# Altium PCB PIR.PcbDoc
Units mm, origin at the board's own origin, x right, y up, seen from the top; angles counter-clockwise.
Board outline 30 x 10.6 mm, 2 copper layers (Top Layer, Bottom Layer); 21 components, 12 nets, 43 pads, 0 vias.
Unrouted connection lines stored in the file: 28.
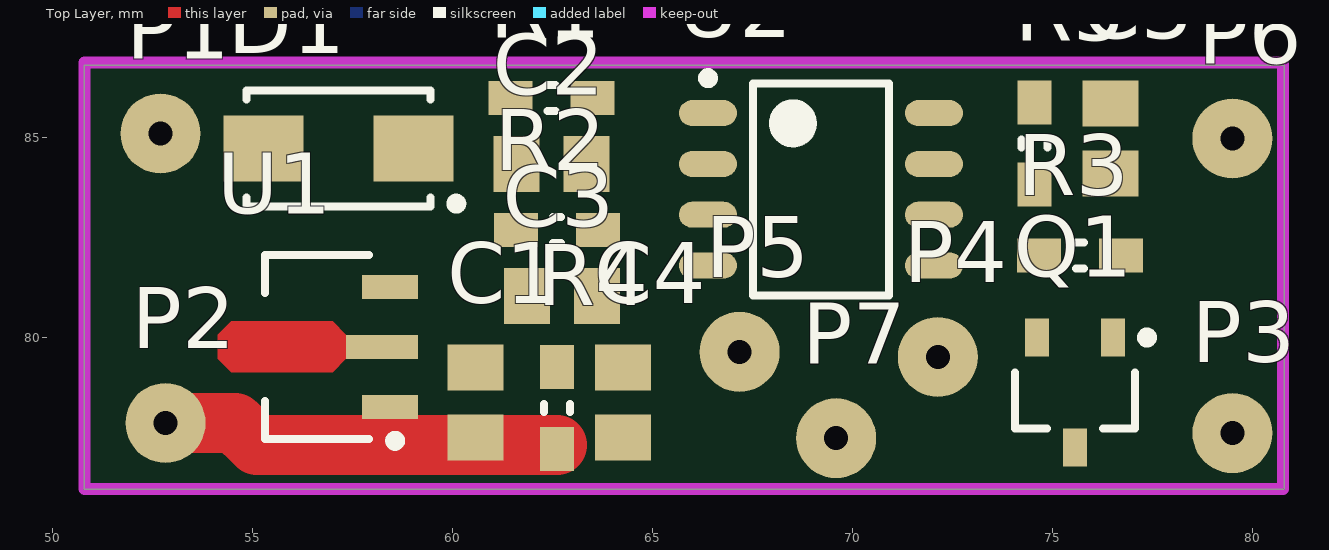
[diagram p0: Top Layer view]
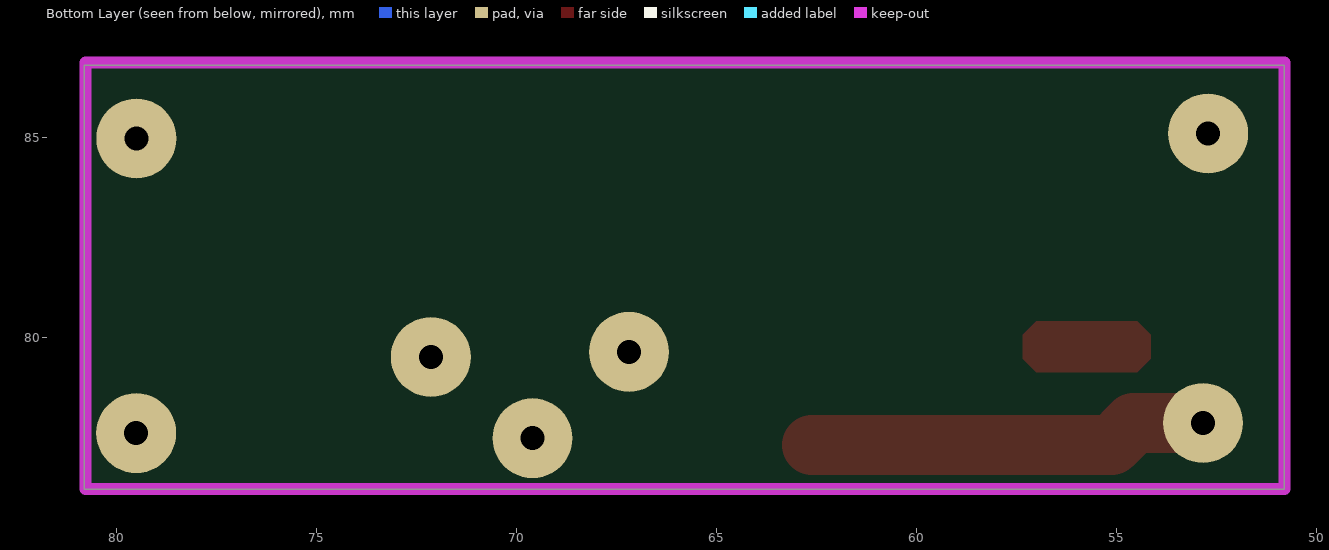
[diagram p1: Bottom Layer view, seen from below]

## Layer stack, top to bottom
Top Solder: solder mask 0.0102, Solder Resist, Dk 3.5
Top Layer: signal copper 0.0356
Dielectric 1: dielectric 0.32, FR-4, Dk 4.8
Bottom Layer: signal copper 0.0356
Bottom Solder: solder mask 0.0102, Solder Resist, Dk 3.5

## Board outline
50.8,76.2 80.8,76.2 80.8,86.8 50.8,86.8

## Design rules (kind name [scope] priority, off if disabled: settings)
Clearance [All] p1: gap=0.2 ignorepadtopadclearanceinfootprint=FALSE
PolygonConnect [All] p1: connectstyle=Relief reliefconductorwidth=0.254 reliefentries=4 polygonreliefangle="90 Angle" airgapwidth=0.254
RoutingVias [All] p1: holewidth=0.6 width=1 viastyle="Through Hole" minholewidth=0.711 minwidth=1.27 maxholewidth=0.711 maxwidth=1.27
SolderMaskExpansion [All] p1: expansion=0.102
Width Power [InNet('GND')  Or InNet('VCC_12V') Or InNet('VCC_5V')] p1: maxlimit=2 minlimit=0.5 preferedwidth=1.5
Width [All] p2: maxlimit=1 minlimit=0.3 preferedwidth=0.5
30 further rules are at their usual default settings.

## Components (designator, comment, footprint, x,y, rotation, side; value= is the part's Value field where it differs from the comment)
C1 "106" CAPC2012X12N 60.579,78.359 r90 top
C2 "103" CAPC2012X12N 62.484,84.328 r0 top
C3 "103" CAPC2012X12N 62.738,81.026 r180 top
C4 "103" CAPC2012X12N 64.262,78.359 r90 top
C5 "102" CAPC2012X12N 76.454,84.963 r270 top
D1 "1N4007" SODFL504X244-2N 57.15,84.709 r180 top
P1 "P" Point 52.705,85.09 r0 top
P2 "P" Point 52.832,77.851 r0 top
P3 "P" Point 79.502,77.597 r0 top
P4 "D" Point 72.136,79.502 r0 top
P5 "S" Point 67.183,79.629 r0 top
P6 "P" Point 79.5,84.963 r0 top
P7 "GND" Point 69.596,77.47 r0 top
Q1 "AO3400" SOT95P278X125-3N 75.565,78.613 r270 top
R1 "3M" RESC2608X06N_0603 62.484,85.979 r0 top
R2 "10K" RESC2608X06N_0603 62.611,82.677 r180 top
R3 "1K" RESC2608X06N_0603 75.692,82.042 r0 top
R4 "47K" RESC2608X06N_0603 62.611,78.232 r90 top
R5 "300K" RESC2608X06N_0603 74.549,84.836 r90 top
U1 "CJA1117B-5.0 SOT89" SOT89-150P409X160-3N 56.642,79.756 r180 top
U2 "EG4002C" TSOP127P620X155-8N 69.215,83.693 r0 top

## Footprints (in the part's own frame and the unit in brackets; to place one, negate y for a bottom-side part, rotate by r counter-clockwise, add the part's x,y. Pads: shape width x height; smd on the part's side, far side on the other; paste and mask are expansions set on the pad)
CAPC2012X12N [mm] "Chip Capacitor, 2-Leads, Body 2.00x1.25mm, IPC Medium Density"
  rect 1.15x1.4 smd: 1(-0.875,0) 2(0.875,0)
  body extent -1.1,-0.67 1.1,0.67, height 1.2
Point [mm]
  round 2 hole 0.6: 1(0,0)
RESC2608X06N_0603 [mm] "Chip Resistor, 2-Leads, Body 2.60x0.80mm, IPC Medium Density"
  rect 1.1x0.85 smd: 1(-1.025,0) 2(1.025,0)
  silkscreen extent -0.1,-0.33 0.1,0.33, body extent -1.3,-0.4 1.3,0.4, height 0.6
SODFL504X244-2N [mm] "SODFL, 2-Leads, Body 2.70x5.04mm, IPC Medium Density"
  rect 2x1.65 smd: 1(-1.875,0) 2(1.875,0)
  silkscreen extent -3.08,-1.45 2.3,1.5, body extent -2.3,-1.45 2.3,1.45, height 2.44
SOT89-150P409X160-3N [mm] "SOT89, 3-Leads, Body 4.50x2.45mm, Pitch 1.50mm, Lead Span 4.1mm, IPC Medium Density"
  rect 1.4x0.6 smd: 1(-1.8,1.5) 3(-1.8,-1.5)
  rect 1.8x0.6 smd: 2(-1.6,0)
  Top Layer region: -0.7,0.3 -0.365,0.635 2.165,0.635 2.5,0.3 2.5,-0.3 2.165,-0.635 -0.365,-0.635 -0.7,-0.3
  silkscreen extent -2.05,-2.3 1.32,2.47, body extent -1.28,-2.3 1.32,2.3, height 1.6
SOT95P278X125-3N [mm] "SOT23, 3-Leads, Body 2.92x2.78mm, Pitch 0.95mm, IPC Medium Density"
  rect 0.95x0.6 smd: 1(-1.375,0.95) 2(-1.375,-0.95) 3(1.375,0)
  silkscreen extent -1.5,-1.5 0.9,1.93, body extent -0.9,-1.52 0.9,1.52, height 1.25
TSOP127P620X155-8N [mm] "TSOP, 8-Leads, Body 5.15x4.05mm, Pitch 1.27mm, IPC Medium Density"
  oval 1.45x0.65 smd: 1(-2.825,1.905) 2(-2.825,0.635) 3(-2.825,-0.635) 4(-2.825,-1.905) 5(2.825,-1.905) 6(2.825,-0.635) 7(2.825,0.635) 8(2.825,1.905)
  silkscreen extent -2.95,-2.65 1.7,2.9, body extent -2.1,-2.65 2.1,2.65, height 1.55

## Part data
C1: library part "Capacitor 106"
C2 C3 C4: library part "Capacitor 103 0603"
C5: library part "Capacitor 102 0603"
D1: library part "1N4007_SMD Diode", "1N4007_SMD"
P1 P2 P3 P4 P5 P6 P7: library part Point
Q1: library part "AO3400  MOSFET SOT23-3", "AO3400  MOSFET SOT23-3"
R1: library part 3M_0603_5%, "Thick Film Resistors - SMD 0603 3MOHMS 5% 1/10WATT", Supplier Part Number 1=CR0603-JW-101ELFCT-ND, Supplier 1=Digi-Key
R2: library part R10k_0603_5%, "RES SMD 10K OHM 1% 1/4W 0603", Supplier Part Number 1=541-10.0KSCT-ND, Supplier 1=Digi-Key
R3: library part 1k_0603_5%, "Thick Film Resistors - SMD 0603 1kOHMS 5% 1/10WATT", Supplier Part Number 1=CR0603-JW-101ELFCT-ND, Supplier 1=Digi-Key
R4: library part 47k_0603_5%, "Thick Film Resistors - SMD 0603 47kOHMS 5% 1/10WATT", Supplier Part Number 1=CR0603-JW-101ELFCT-ND, Supplier 1=Digi-Key
R5: library part 300k_0603_5%, "Thick Film Resistors - SMD 0603 300kOHMS 5% 1/10WATT", Supplier Part Number 1=CR0603-JW-101ELFCT-ND, Supplier 1=Digi-Key
U1: "CJA1117B-5.0 SOT89 Power IC 1A 5V_IC"
U2: "IC PIR CONTROLLER8SOIC", Supplier Part Number 1=MAX485CSA+-ND, Supplier 1=Digi-Key

## Nets (pads, with @x,y where several pads share a name; then routed paths per layer and width w, separated by ;. In a path a pad name is that pad's centre, name@x,y a point inside that pad or via, vN(x,y) a via of type N, cw(c..) or ccw(c..) an arc to the next point about the centre after c; other vN are vias at no path point)
CT: C5.2 R5.1 U2.7
GND: C1.1 C4.1 C5.1 P2.1 P7.1 Q1.2 R4.1 U1.1 U2.5 | length 10.1
  Top Layer w1.5: P2.1 54.567,77.851 55.118,77.3 60.579,77.3 R4.1@62.611,77.3 ; P7.1@69.551,77.425 P7.1
NetC2_1: C2.1 R1.1 R2.2 U2.2
NetC2_2: C2.2 R1.2 U2.1
NetC3_1: C3.1 R2.1
NetC3_2: C3.2 C4.2 P5.1 R4.2
NetD1_1: D1.1 U1.3
NetP3_1: P3.1 Q1.3
NetQ1_1: Q1.1 R3.2
NetR3_1: R3.1 U2.6
VCC_5V: C1.2 P4.1 R5.2 U1.2 U2.3 U2.4 U2.8
VCC_12V: D1.2 P1.1 P6.1

## Keep-outs
Keep-Out Layer:
  lines w0.3: 50.8,76.2 50.8,86.868 80.772,86.868 80.772,76.2 50.8,76.2

## Silkscreen, mask and mechanical layers (free items; w line width, h text height)
Drill Drawing:
  text ".LEGEND" at 85.88,81.28 h1.52
  text "Drill Drawing." at 85.88,78.74 h1.52

## Dimensions
50.8,76.2 to 50.8,86.868 on Mechanical 1
50.8,76.2 to 80.772,76.2 on Mechanical 1